# Altium PCB Game of Simon_01.PcbDoc
Units mil, origin at the board's own origin, x right, y up, seen from the top; angles counter-clockwise.
Board outline 3149.61 x 1929.13 mil, 2 copper layers (Top Layer, Bottom Layer), stack 65.792 mil thick; 15 components, 14 nets, 77 pads, 11 vias.
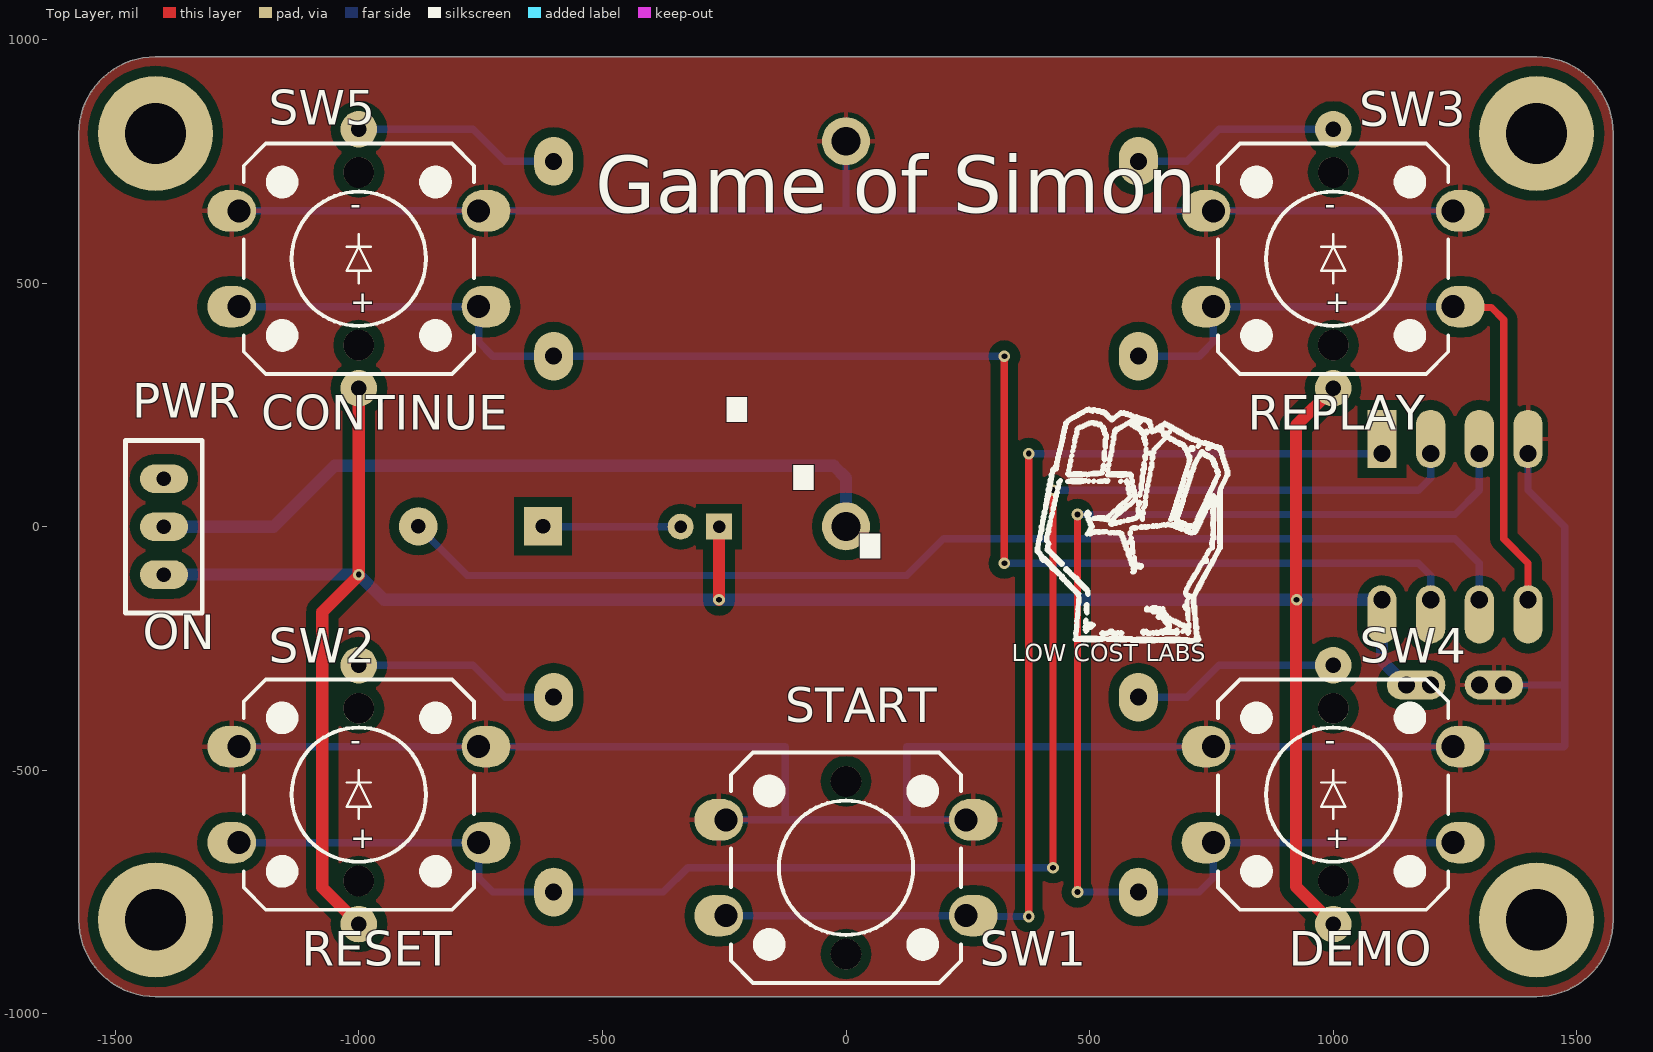
[diagram p0: Top Layer view]
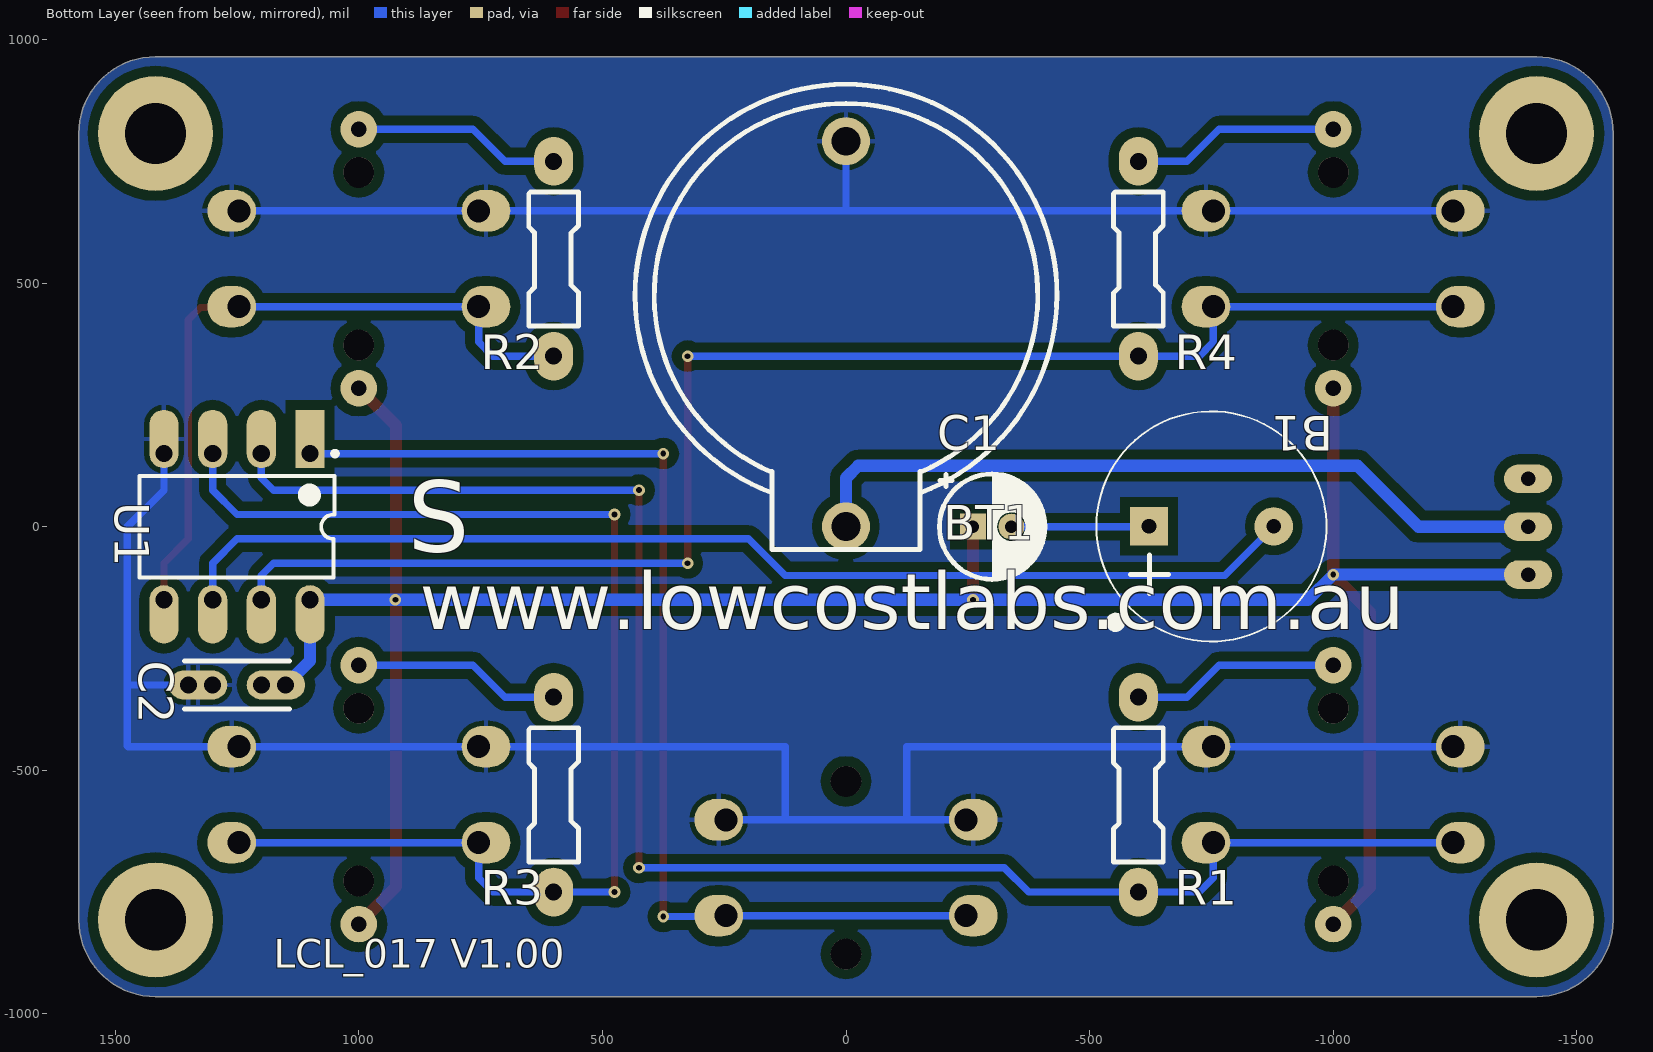
[diagram p1: Bottom Layer view, seen from below]
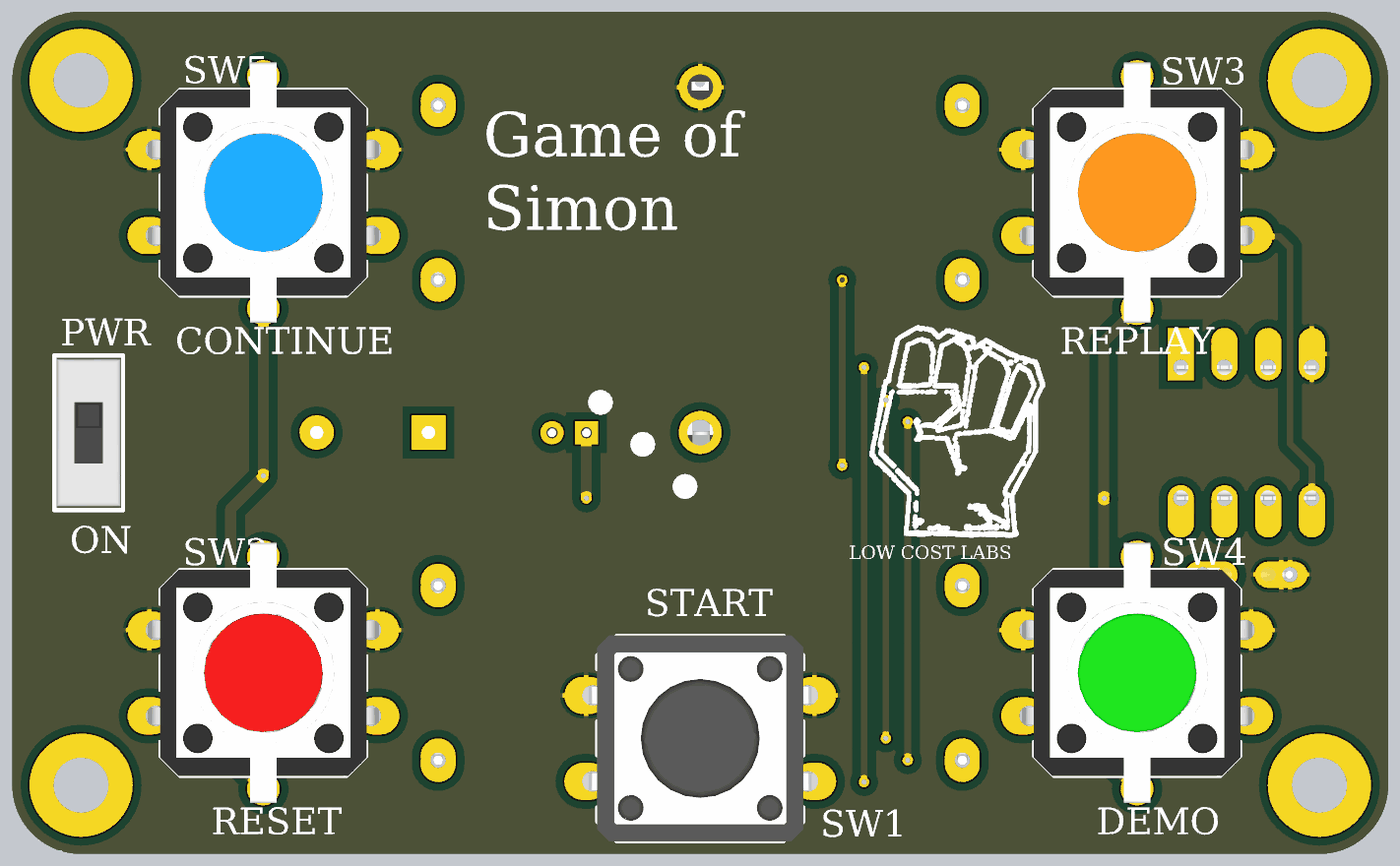
[diagram p2: 3D render of the assembled board from above, using the file's embedded part models]
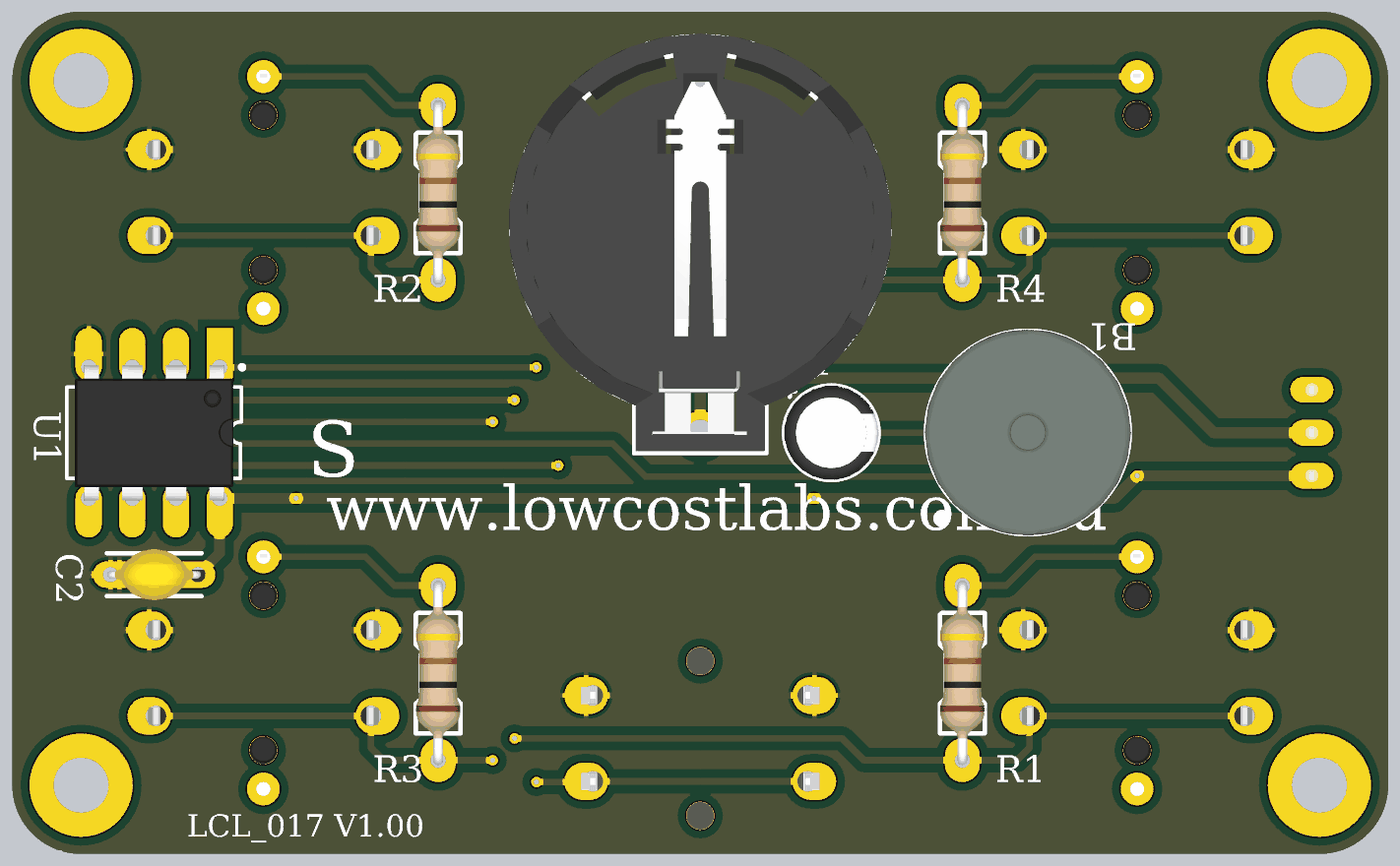
[diagram p3: 3D render of the assembled board from below, using the file's embedded part models]

## Layer stack, top to bottom
Top Solder: solder mask 0.4, Solder Resist, Dk 3.5
Top Layer: signal copper 1.4
Dielectric 1: dielectric 62.9921, FR-4, Dk 4.8
Bottom Layer: signal copper 1.4
Bottom Solder: solder mask 0.4, Solder Resist, Dk 3.5

## Board outline
-1574.8,-807.09 ccw(c-1417.32,-807.09) -1417.32,-964.57 1417.32,-964.57 ccw(c1417.32,-807.09) 1574.8,-807.09 1574.8,807.09 ccw(c1417.32,807.09) 1417.32,964.57 -1417.32,964.57 ccw(c-1417.32,807.09) -1574.8,807.09

## Design rules (kind name [scope] priority, off if disabled: settings)
Clearance Poly_GND [inPolygon vs not innet (gnd)] p1: gap=20
Clearance [All] p2: gap=8
HoleSize [All] p1 off: absolutevalues=TRUE maxlimit=100 minlimit=1 maxpercent=80.000 minpercent=20.000
HoleSize Testpoint [All] p2 off: absolutevalues=TRUE maxlimit=100 minlimit=1 maxpercent=80.000 minpercent=20.000
HoleSize TestPointUsage [All] p3 off: absolutevalues=TRUE maxlimit=100 minlimit=1 maxpercent=80.000 minpercent=20.000
HoleToHoleClearance [All] p1 off: gap=10 allowstackedmicrovias=TRUE
LayerPairs [All] p1 off: enforce=TRUE
MinimumSolderMaskSliver [All] p1 off: minsoldermaskwidth=10
MinimumSolderMaskSliver SilkscreenOverComponentPads [All] p2 off: minsoldermaskwidth=10
NetAntennae [All] p1 off: netantennaetolerance=0
PolygonConnect [All] p1: connectstyle=Relief reliefconductorwidth=10 reliefentries=4 polygonreliefangle="90 Angle" airgapwidth=10
RoomDefinition U_PSU [InComponentClass('U_PSU')] p1: confinementstyle=ConfineIn formatcopy=TRUE lockcomponents=FALSE outline -5515.75,-3515.75 -2366.14,-3515.75 -2366.14,-1547.24 -5515.75,-1547.24
RoomDefinition U_Peripherals [InComponentClass('U_Peripherals')] p2: confinementstyle=ConfineIn formatcopy=TRUE lockcomponents=FALSE outline -5515.75,-3515.75 -2366.14,-3515.75 -2366.14,-1547.24 -5515.75,-1547.24
RoomDefinition U_Micro [InComponentClass('U_Micro')] p3: confinementstyle=ConfineIn formatcopy=TRUE lockcomponents=FALSE outline -5515.75,-3515.75 -2366.14,-3515.75 -2366.14,-1547.24 -5515.75,-1547.24
RoomDefinition U_Bus [InComponentClass('U_Bus')] p4: confinementstyle=ConfineIn formatcopy=TRUE lockcomponents=FALSE outline -5515.75,-3515.75 -2366.14,-3515.75 -2366.14,-1547.24 -5515.75,-1547.24
RoomDefinition "4 Button Plate" [InComponentClass('4 Button Plate')] p5: confinementstyle=ConfineIn formatcopy=TRUE lockcomponents=FALSE outline -5515.75,-3515.75 -2366.14,-3515.75 -2366.14,-1547.24 -5515.75,-1547.24
RoutingVias [All] p1: holewidth=12 width=24 viastyle="Through Hole" minholewidth=12 minwidth=24 maxholewidth=28 maxwidth=50
SilkToSilkClearance [All] p1 off: silktosilkclearance=10
SilkToSolderMaskClearance [IsPad] p1 off: minsilkscreentomaskgap=10 clearancetoexposedcopper=TRUE
SolderMaskExpansion [All] p1: expansion=4
Width Standard [All] p1: maxlimit=25 minlimit=8 preferedwidth=8
Width Power [inNet('VIN')] p2: maxlimit=100 minlimit=8 preferedwidth=25
23 further rules are at their usual default settings.

## Components (designator, comment, footprint, x,y, rotation, side; value= is the part's Value field where it differs from the comment)
B1 "42R" BUZZER -750,0.59 r90 bottom
BT1 "CR2032 Battery Holder" "CR2032 HOLDER" 0,475 r270 bottom
C1 "10uF" "CAP ELECTRO 5mm" -300,0 r180 bottom
C2 "10nF" "CAP 0.100\"" 1250,-325 r0 bottom
PWR "SS12D00G3" SS12D00G3 -1400,0 r270 top
R1 "1k" "RESISTOR 0.400\"" -600,-550 r270 bottom
R2 "1k" "RESISTOR 0.400\"" 600,550 r270 bottom
R3 "1k" "RESISTOR 0.400\"" 600,-550 r270 bottom
R4 "1k" "RESISTOR 0.400\"" -600,550 r270 bottom
SW1 "12MM TACT SWITCH" "12mm TACT THROUGH HOLE" 0,-700 r0 top
SW2 "TACT RED" "ILLUMINATED TACT RED" -1000,-550 r0 top
SW3 "TACT ORANGE" "ILLUMINATED TACT ORANGE" 1000,550 r0 top
SW4 "TACT GREEN" "ILLUMINATED TACT GREEN" 1000,-550 r0 top
SW5 "TACT BLUE" "ILLUMINATED TACT BLUE" -1000,550 r0 top
U1 "ATTINY13-20SSU" DIP-8 1250,0 r270 bottom

## Footprints (in the part's own frame and the unit in brackets; to place one, negate y for a bottom-side part, rotate by r counter-clockwise, add the part's x,y. Pads: shape width x height; smd on the part's side, far side on the other; paste and mask are expansions set on the pad)
"12mm TACT THROUGH HOLE" [mil] "12mm TACT THROUGH HOLE"
  oval 100x85 hole 47.24 copper offset -15,0: 1(-246.06,98.43) 2(-246.06,-98.43)
  oval 100x85 hole 47.24 copper offset 15,0: 1(246.06,98.43) 2(246.06,-98.43)
  round 62.99 hole 62.99: MOUNT(0,-177.17) MOUNT(0,177.17)
  silkscreen extent -236,-236 236,236, body extent -273,-236 273,236, height 335
BUZZER [mm]
  rect 2x2 hole 0.762: 1(0,3.25)
  round 2 hole 0.762: 2(0,-3.25)
  silkscreen extent -6,-6 6,6, body extent -6,-6 6,6, height 8.51
"CAP 0.100\"" [mil]
  round 60 hole 35: 1(-99.99,0) 2(100.01,0)
  oval 120x60 hole 35 copper offset -30,0: 1(-49.99,0)
  oval 120x60 hole 35 copper offset 30,0: 2(50.01,0)
  silkscreen extent -108,-49 108,49, body extent -107,-59 107,59, height 176
"CAP ELECTRO 5mm" [mm]
  rect 1.35x1.35 hole 0.65: 1(-1,0)
  round 1.35 hole 0.65: 2(1,0)
  silkscreen extent -2.75,-2.75 2.75,2.75, body extent -2.75,-2.75 2.75,2.75, height 12.5
"CR2032 HOLDER" [mm]
  round 2.5 hole 1.5: 1(12.05,0) 2(-8.035,0)
  silkscreen extent -11,-11 13.25,11, body extent -11.15,-11.15 13.15,11.15, height 8.5
DIP-8 [mil] "DIP, 14-Pin, Row Spacing 7.62 mm, Pitch 2.54 mm"
  rect 120x60 hole 35 copper offset -30,0: 1(-150,150)
  rrect100% 120x60 hole 35.43 copper offset -30,0: 2(-150,50) 3(-150,-50) 4(-150,-150)
  rrect100% 120x60 hole 35.43 copper offset 30,0: 5(150,-150) 6(150,-50) 7(150,50) 8(150,150)
  silkscreen extent -155,-200 104,206, body extent -155,-181 155,181, height 152
"ILLUMINATED TACT BLUE" [mil]
  oval 100x85 hole 47.24 copper offset -15,0: 1(-246.06,98.43) 2(-246.06,-98.43)
  oval 100x85 hole 47.24 copper offset 15,0: 1(246.06,98.43) 2(246.06,-98.43)
  round 75 hole 31.5: A(0,265.75) K(0,-265.75)
  round 62.99 hole 62.99: MOUNT(0,-177.17) MOUNT(0,177.17)
  silkscreen extent -236,-236 236,236, body extent -264,-298 264,298, height 290
"ILLUMINATED TACT GREEN" [mil]
  oval 100x85 hole 47.24 copper offset -15,0: 1(-246.06,98.43) 2(-246.06,-98.43)
  oval 100x85 hole 47.24 copper offset 15,0: 1(246.06,98.43) 2(246.06,-98.43)
  round 75 hole 31.5: A(0,265.75) K(0,-265.75)
  round 62.99 hole 62.99: MOUNT(0,-177.17) MOUNT(0,177.17)
  silkscreen extent -236,-236 236,236, body extent -264,-298 264,298, height 290
"ILLUMINATED TACT ORANGE" [mil]
  oval 100x85 hole 47.24 copper offset -15,0: 1(-246.06,98.43) 2(-246.06,-98.43)
  oval 100x85 hole 47.24 copper offset 15,0: 1(246.06,98.43) 2(246.06,-98.43)
  round 75 hole 31.5: A(0,265.75) K(0,-265.75)
  round 62.99 hole 62.99: MOUNT(0,-177.17) MOUNT(0,177.17)
  silkscreen extent -236,-236 236,236, body extent -264,-299 264,298, height 290
"ILLUMINATED TACT RED" [mil]
  oval 100x85 hole 47.24 copper offset -15,0: 1(-246.06,98.43) 2(-246.06,-98.43)
  oval 100x85 hole 47.24 copper offset 15,0: 1(246.06,98.43) 2(246.06,-98.43)
  round 75 hole 31.5: A(0,265.75) K(0,-265.75)
  round 62.99 hole 62.99: MOUNT(0,-177.17) MOUNT(0,177.17)
  silkscreen extent -236,-236 236,236, body extent -264,-299 264,298, height 290
"RESISTOR 0.400\"" [mil]
  oval 100x80 hole 35: 1(-200,0) 2(200,0)
  silkscreen extent -137,-51 138,51, body extent -211,-51 211,51, height 106
SS12D00G3 [mm] "SS12D00G3 TOGGLE SWITCH"
  oval 1.5x2.5 hole 0.75: 1(-2.5,0) 2(0,0) 3(2.5,0)
  silkscreen extent -4.5,-2 4.5,2, body extent -4.29,-1.85 4.29,1.85, height 6.97

## Part data
B1: library part BUZZER
BT1: library part CMP-dvcba8mzfnv4aqscf1uc-2, "CR2032 Battery Holder, Through Hole, Horizontal Mount"
C1: library part CMP-su2zmkw1kc3z49ns9isd-1, "5mm Through Hole Electrolytic 2mm Pitch, 5mm height"
C2: library part CMP-f9eb30fd1b76262c-1, "Capacitor, Ceramic, 10000pF, 50VDC, 20-% Tol, 20+% Tol, X7R-TC Code, -15, 15%-TC"
PWR: library part "SS12D00G3 Toggle Switch", "SS12D00G3 Toggle Switch"
R1 R2 R3 R4: library part CMP-iaxfckaaxq3jb0c9euu5-1, "RESISITOR THROUGH HOLE 1/4W"
SW2: "12mm TACT SWITCH RED"
SW3: "12mm TACT SWITCH ORANGE"
SW4: "12mm TACT SWITCH GREEN"
SW5: "ILLUMINATED 12MM TACT SWITCH (BLUE)"
U1: "ATtiny Series 20 MHz 1 KB Flash 64 B SRAM 8-Bit Microcontroller - SOIC-8"

## Free pads (board coordinates)
  round 10 on Mech16: 1(5082.1,-3582.94) 1(5082.1,-3582.94) 1(5082.62,-3660.05) 1(5082.62,-3660.05) 1(5269.4,-3515.17) 1(5269.4,-3515.17)
  round 236.22 hole 125.98: MOUNT(-1417.32,-807.09) MOUNT(-1417.32,807.09) MOUNT(1417.32,-807.09) MOUNT(1417.32,807.09)

## Via types
v1: diameter 24, hole 12, Top Layer to Bottom Layer, 11 vias

## Nets (pads, with @x,y where several pads share a name; then routed paths per layer and width w, separated by ;. In a path a pad name is that pad's centre, name@x,y a point inside that pad or via, vN(x,y) a via of type N, cw(c..) or ccw(c..) an arc to the next point about the centre after c; other vN are vias at no path point)
BLUE: R4.2 SW5.2 U1.7 | length 3016
  Top Layer w15: v1(325,-75) v1(325,350)
  Bottom Layer w15: SW5.2@-1246.06,451.57 -753.94,451.57 -753.94,378.94 -725,350 R4.2 v1(325,350) ; v1(325,-75) 1175,-75 1200,-100 U1.7
BUZZER: B1.2 U1.6 | length 2346.4
  Bottom Layer w15: B1.2 -777.37,-100 125,-100 200,-25 1250,-25 1300,-75 U1.6
GND: BT1.2 C2.2 SW1.1 SW2.1 SW3.1 SW4.1 SW5.1 U1.4 | length 6654.9
  Bottom Layer w15: SW2.1@-1246.06,-451.57 -753.94,-451.57 -125,-451.57 -125,-601.57 ; SW5.1@-1246.06,648.43 -753.94,648.43 0,648.43 ; SW1.1@-246.06,-601.57 -125,-601.57 ; BT1.2 0,648.43 ; SW1.1@246.06,-601.57 125,-601.57 ; SW3.1@1246.06,648.43 753.94,648.43 0,648.43 ; C2.2@1350.01,-325 1475,-325 ; U1.4 1400,75 1475,0 1475,-325 ; -125,-601.57 125,-601.57 ; 125,-601.57 125,-451.57 753.94,-451.57 1246.06,-451.57 1473.43,-451.57 1475,-450 1475,-325
GREEN: R3.2 SW4.2 U1.3 | length 2551.4
  Top Layer w15: v1(475,-750) v1(475,25)
  Bottom Layer w15: v1(475,-750) R3.2 725,-750 753.94,-721.06 753.94,-648.43 SW4.2@1246.06,-648.43 ; v1(475,25) 1250,25 1300,75 U1.3
NetB1_1: B1.1 C1.2 | length 282.1
  Bottom Layer w15: B1.1@-621.45,0 C1.2
NetBT1_1: BT1.1 PWR.2 | length 1561.5
  Bottom Layer w25: PWR.2 -1175.01,0.01 -1050.01,125 -25,125 0,100 BT1.1
NetR1_1: R1.1 SW2.A | length 427.2
  Bottom Layer w15: SW2.A -765.75,-284.25 -700,-350 R1.1
NetR2_1: R2.1 SW3.A | length 427.2
  Bottom Layer w15: R2.1 700,750 765.75,815.75 SW3.A
NetR3_1: R3.1 SW4.A | length 427.2
  Bottom Layer w15: R3.1 700,-350 765.75,-284.25 SW4.A
NetR4_1: R4.1 SW5.A | length 427.2
  Bottom Layer w15: SW5.A -765.75,815.75 -699.99,750 R4.1
ORANGE: R2.2 SW3.2 U1.5 | length 1441.3
  Top Layer w15: SW3.2@1246.06,451.57 1247.64,450 1325,450 1350,425 1350,-25 1400,-75 U1.5
  Bottom Layer w15: R2.2 725,350 753.94,378.94 753.94,451.57 SW3.2@1246.06,451.57
RED: R1.2 SW2.2 U1.2 | length 3386.7
  Top Layer w15: v1(425,-700) v1(425,75)
  Bottom Layer w15: SW2.2@-1246.06,-648.43 -753.94,-648.43 -753.94,-721.06 -725,-750 R1.2 -575,-750 -375,-750 -325,-700 v1(425,-700) ; v1(425,75) 1175,75 1200,100 U1.2
START: SW1.2 U1.1 | length 2296.7
  Top Layer w15: v1(375,-800) v1(375,150)
  Bottom Layer w15: SW1.2@-246.06,-798.43 246.06,-798.43 247.64,-800 v1(375,-800) ; v1(375,150) U1.1
VCC: C1.1 C2.1 PWR.3 SW2.K SW3.K SW4.K SW5.K U1.8 | length 5192.6
  Top Layer w25: SW2.K -1075,-740.74 -1075,-175 -1000,-100 v1(-1000,-98.42) SW5.K ; v1(-260.63,-150) C1.1 ; SW4.K 923.43,-739.17 923.43,207.68 SW3.K
  Bottom Layer w25: PWR.3 v1(-1000,-98.42) ; v1(-1000,-98.42) -948.42,-150 v1(-260.63,-150) v1(925,-150) U1.8 1100.01,-275 C2.1@1150.01,-325
pads on no net: PWR.1 SW1.MOUNT SW2.MOUNT SW3.MOUNT SW4.MOUNT SW5.MOUNT

## Polygon pours and split planes (outlines as drawn)
GND on Top Layer "TOP GND" (solid, remove dead copper, pour order 0): -1574.8,-807.09 ccw(c-1417.32,-807.09) -1417.32,-964.57 1417.32,-964.57 ccw(c1417.32,-807.09) 1574.8,-807.09 1574.8,807.09 ccw(c1417.32,807.09) 1417.32,964.57 -1417.32,964.57 ccw(c-1417.32,807.09) -1574.8,807.09
GND on Bottom Layer "BOTTOM GND" (solid, pour order 1): -1574.8,-807.09 ccw(c-1417.32,-807.09) -1417.32,-964.57 1417.32,-964.57 ccw(c1417.32,-807.09) 1574.8,-807.09 1574.8,807.09 ccw(c1417.32,807.09) 1417.32,964.57 -1417.32,964.57 ccw(c-1417.32,807.09) -1574.8,807.09

## Silkscreen, mask and mechanical layers (free items; w line width, h text height)
Top Overlay:
  drawing of 3735 lines, arcs and shapes, not listed
  text "Game of Simon" at -515,605 h200
  text "CONTINUE" at -1200,175 h120
  text "REPLAY" at 825,175 h120
  text "⋱" at -292,-148 h629.92
  text "ON" at -1443.16,-275 h120
  text "LOW COST LABS" at 340,-289 h60
  text "START" at -125,-425 h120
  text "RESET" at -1117.37,-925 h120
  text "DEMO" at 908.51,-925 h120
Bottom Overlay:
  text "S" at 900,-100 h250
  text "www.lowcostlabs.com.au" at 875,-250 h200
  text "LCL_017 V1.00" at 1175,-925 h100
Mechanical 1:
  the board outline again, w10
Mechanical 32:
  drawing of 655 lines, arcs and shapes, not listed
  text "1" at -4645.67,3996.06 h100
  text "2" at -1377.95,3996.06 h100
  text "3" at 1574.8,3996.06 h100
  text "4" at 4389.76,3996.06 h100
  text "A" at -5767.72,3090.55 h100
  text "A" at 5728.35,3090.55 h100
  text "B" at -5787.4,1003.94 h100
  text "B" at 5708.66,1003.94 h100
  text "C" at -5767.72,-1122.05 h100
  text "C" at 5728.35,-1122.05 h100
  text "D" at -5767.72,-3248.03 h100
  text "D" at 5728.35,-3248.03 h100
  text "LOW COST LABS" at 2696.85,-3307.09 h100
  text "TITLE: Game of Simon" at 1377.95,-3523.62 h100
  text "ludzinc.blogspot.com.au" at 3725,-3550 h100
  text "SIZE: A4" at 1377.95,-3700.79 h100
  text "Number: LCL_017" at 2204.72,-3700.79 h100
  text "Revison 1.00" at 2992.13,-3700.79 h100
  text "www.lowcostlabs.com.au" at 3740.16,-3700.79 h100
  text "DATE:" at 1377.95,-3818.9 h100
  text ".Print_Date" at 1614.17,-3818.9 h100
  text "SHEET 1 of 1" at 2992.13,-3818.9 h100
  text "FILE:" at 1377.95,-3917.32 h100
  text ".Pcb_File_Name" at 1614.17,-3917.32 h100
  text "S" at -5649.61,-3937.01 h100
  text "1" at -4645.67,-4055.12 h100
  text "2" at -1377.95,-4055.12 h100
  text "3" at 1574.8,-4055.12 h100
  text "4" at 4389.76,-4055.12 h100

## Text inside footprints (layer, text, board x,y; h text height)
SW2: Top Overlay "+" at -1017.5,-675 h77.5; Top Overlay "-" at -1017.5,-475 h77.5
SW3: Top Overlay "-" at 982.5,625 h77.5; Top Overlay "+" at 982.5,425 h77.5
SW4: Top Overlay "+" at 982.5,-675 h77.5; Top Overlay "-" at 982.5,-475 h77.5
SW5: Top Overlay "-" at -1017.5,625 h77.5; Top Overlay "+" at -1017.5,425 h77.5